# Altium PCB PCB1.PcbDoc
Units mil, origin at the board's own origin, x right, y up, seen from the top; angles counter-clockwise.
Board outline 6000 x 4000 mil, 2 copper layers (Bottom Layer, Top Layer); 52 components, 45 nets, 187 pads, 33 vias.
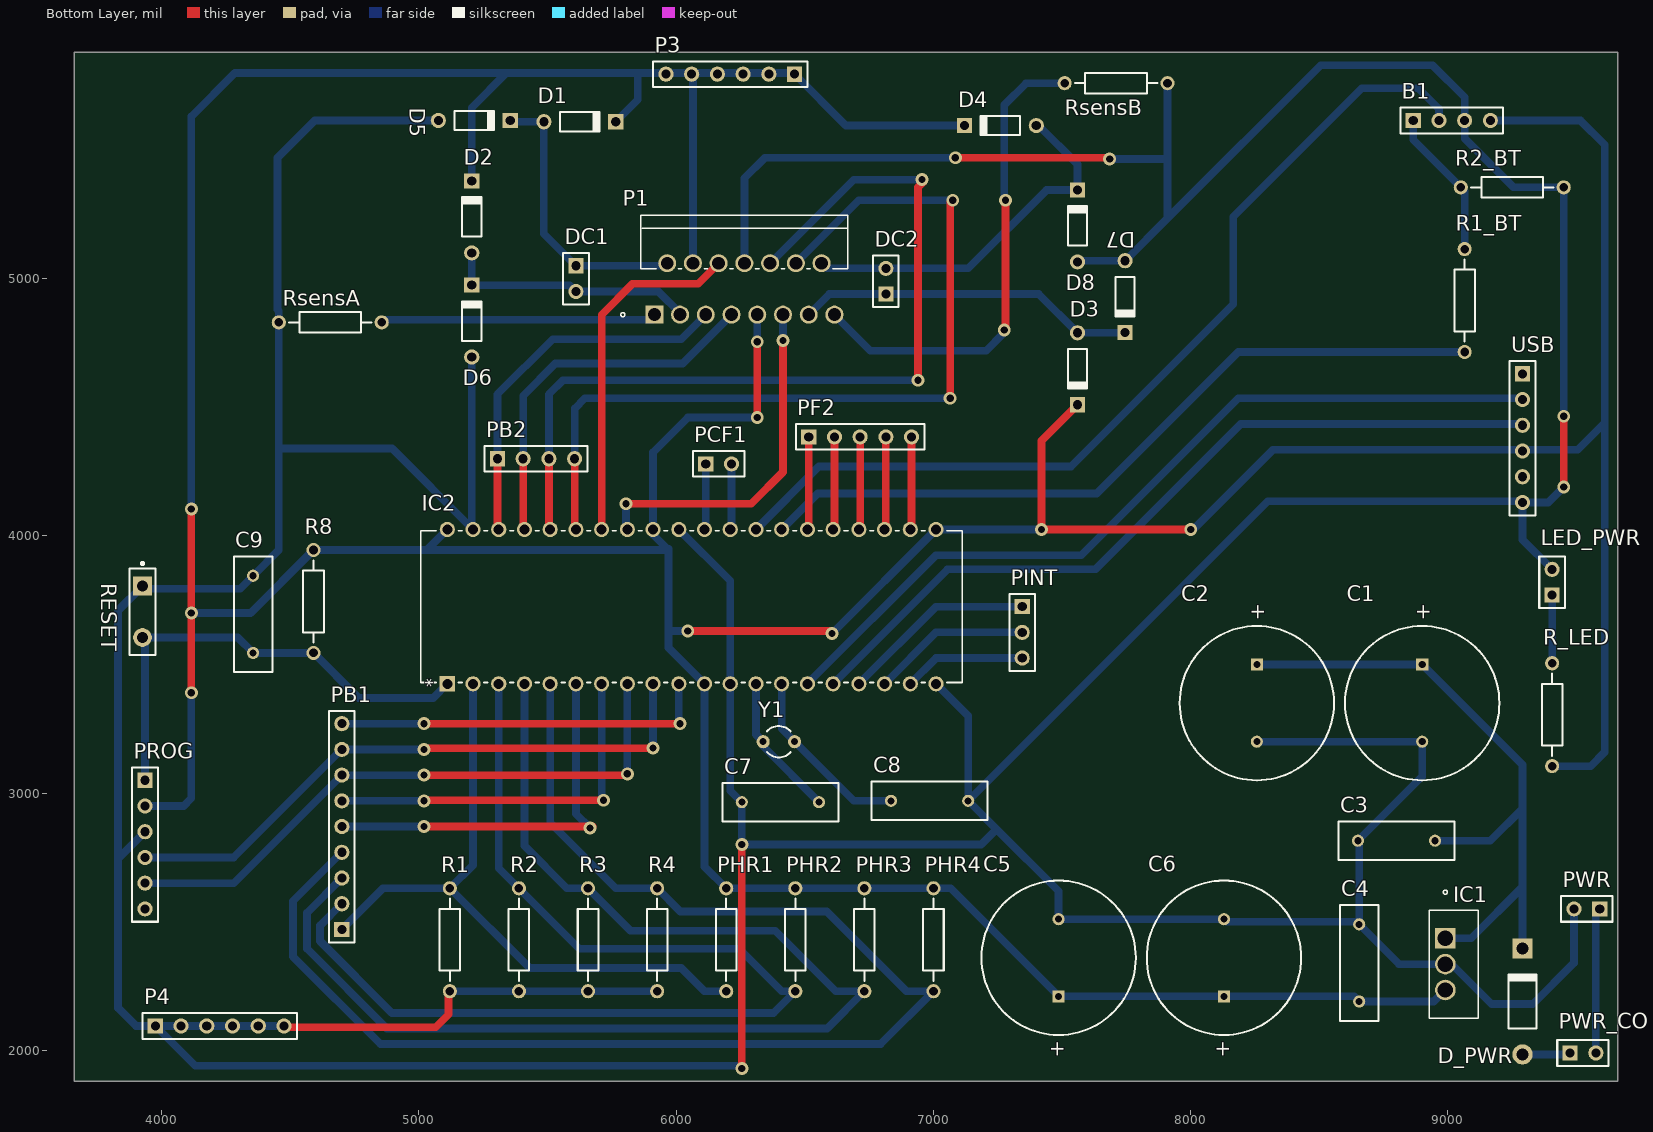
[diagram p0: Bottom Layer view]
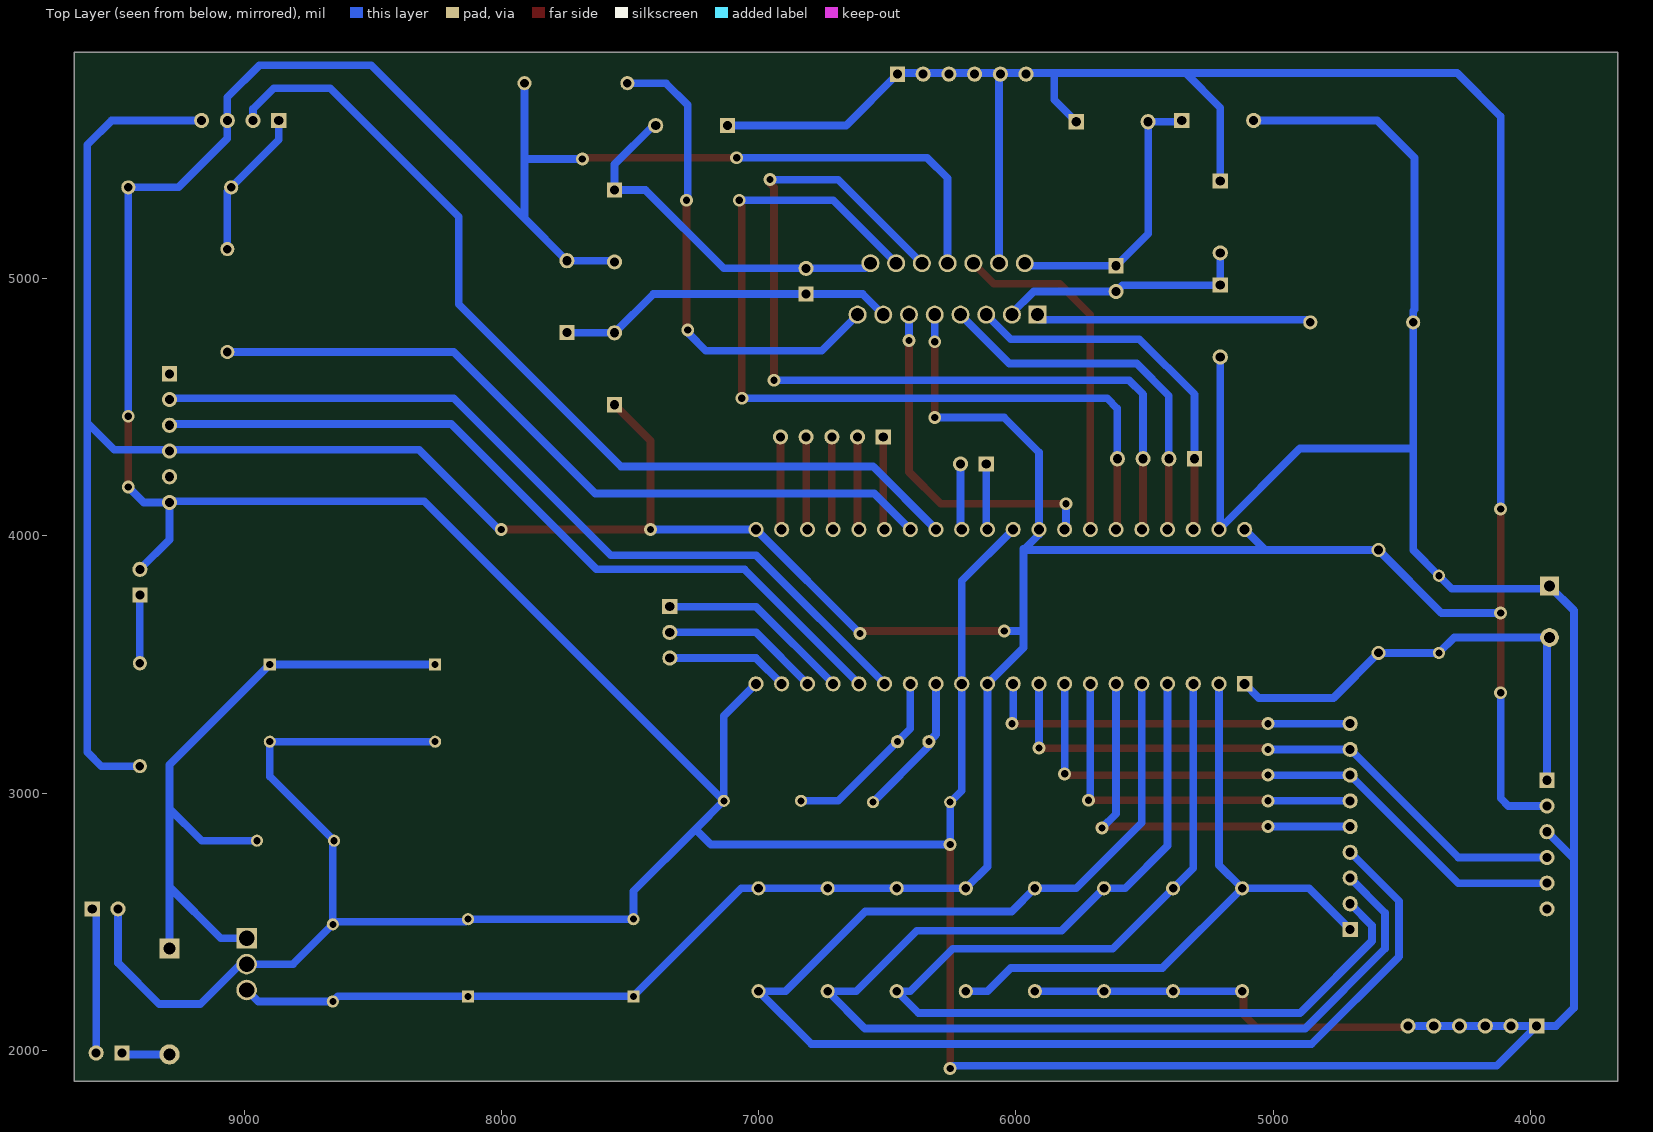
[diagram p1: Top Layer view, seen from below]

## Layer stack, top to bottom
Top Solder: solder mask 0.4, Solder Resist, Dk 3.5
Bottom Layer: signal copper 1.4
Dielectric 1: dielectric 12.6, FR-4, Dk 4.8
Top Layer: signal copper 1.4
Bottom Solder: solder mask 0.4, Solder Resist, Dk 3.5

## Board outline
3660,1880 9660,1880 9660,5880 3660,5880

## Design rules (kind name [scope] priority, off if disabled: settings)
Clearance [All] p1: gap=10 ignorepadtopadclearanceinfootprint=FALSE
PolygonConnect [All] p1: connectstyle=Relief reliefconductorwidth=10 reliefentries=4 polygonreliefangle="90 Angle" airgapwidth=10
RoutingVias [All] p1: holewidth=28 width=50 viastyle="Through Hole" minholewidth=28 minwidth=50 maxholewidth=28 maxwidth=50
SolderMaskExpansion [All] p1: expansion=4
Width [All] p1: maxlimit=50 minlimit=20 preferedwidth=30
30 further rules are at their usual default settings.

## Components (designator, comment, footprint, x,y, rotation, side; value= is the part's Value field where it differs from the comment)
B1 "" HDR1X4 8865,5615 r0 top
C1 "" RB7.6-15 8900,3350 r90 top value=100pF
C2 "" RB7.6-15 8257.13,3350 r90 top value=100pF
C3 "" RAD-0.3 8800,2815 r0 top value=100pF
C4 "" RAD-0.3 8655,2340 r270 top value=100pF
C5 "" RB7.6-15 7486.5,2360 r270 top value=100pF
C6 "" RB7.6-15 8129.37,2360 r270 top value=100pF
C7 "Cap" RAD-0.3 6405,2965 r0 top value=33pF
C8 "Cap" RAD-0.3 6985,2970 r180 top value=33pF
C9 "Cap" RAD-0.3 4355,3695 r90 top value=100nF
D1 "Diode 1N914" DO-35 5625.24,5610 r0 top
D2 "Diode 1N914" DO-35 5205,5240 r90 top
D3 "Diode 1N914" DO-35 7560,4649.76 r270 top
D4 "Diode 1N914" DO-35 7260,5595 r180 top
D5 "Diode 1N914" DO-35 5215,5615 r0 top
D6 "Diode 1N914" DO-35 5205,4835 r90 top
D7 "Diode 1N914" DO-35 7745,4930 r270 top
D8 "Diode 1N914" DO-35 7560,5205 r90 top
D_PWR "" DO-41 9290,2190 r90 top
DC1 "MOTOR" HDR1X2 5610,5050 r270 top
DC2 "MOTOR" HDR1X2 6815,4940 r90 top
IC1 "L7805" TO-220FP_STM 8990,2435.39 r270 top
IC2 "dsPIC30F4013" PDIP40_600MC_MCH 5110,3425 r90 top
LED_PWR "" HDR1X2 9405,3770 r90 top
P1 "L298N" Multiwatt15_V_STM 5915,4860 r0 top
P3 "" HDR1X6 6460,5795 r180 top
P4 "" HDR1X6 3975,2095 r0 top
PB1 "" HDR1X9 4700,2470 r90 top
PB2 "" HDR1X4 5305,4300 r0 top
PCF1 "" HDR1X2 6115,4280 r0 top
PF2 "" HDR1X5 6515,4385 r0 top
PHR1 "Res2" AXIAL-0.4 6194.29,2430 r90 top value=1K
PHR2 "Res2" AXIAL-0.4 6462.86,2430 r90 top value=1K
PHR3 "Res2" AXIAL-0.4 6731.43,2430 r90 top value=1K
PHR4 "Res2" AXIAL-0.4 7000,2430 r90 top value=1K
PINT "INTERRUPTS / D3" HDR1X3 7345,3725 r270 top
PROG "Programator" HDR1X6 3935,3050 r270 top
PWR "Header 2" HDR1X2 9590,2550 r180 top
PWR_CON "Header 2" HDR1X2 9475,1990 r0 top
R1 "Res2" AXIAL-0.4 5120,2430 r90 top value=1K
R1_BT "Res2" AXIAL-0.4 9065,4915 r270 top value=4k7
R2 "Res2" AXIAL-0.4 5388.57,2430 r90 top value=1K
R2_BT "Res2" AXIAL-0.4 9250,5355 r180 top value=10k
R3 "Res2" AXIAL-0.4 5657.14,2430 r90 top value=1K
R4 "Res2" AXIAL-0.4 5925.71,2430 r90 top value=1K
R8 "Res2" AXIAL-0.4 4590,3745 r90 top value=10K
R_LED "" AXIAL-0.4 9405,3305 r270 top value=1K
RESET "SW-PB" SPST-2 3925,3705 r270 top
RsensA "" AXIAL-0.4 4655,4830 r180 top value=1K
RsensB "" AXIAL-0.4 7710,5760 r0 top value=1K
USB "" HDR1X6 9290,4630 r270 top
Y1 "XTAL" R38 6398.98,3200 r270 top

## Footprints (in the part's own frame and the unit in brackets; to place one, negate y for a bottom-side part, rotate by r counter-clockwise, add the part's x,y. Pads: shape width x height; smd on the part's side, far side on the other; paste and mask are expansions set on the pad)
AXIAL-0.4 [mm] "Axial Device, Thru-Hole; 2 Leads; 0.4 in Pin Spacing"
  round 1.4 hole 0.85: 1(-5.08,0) 2(5.08,0)
  silkscreen extent -4.06,-1.02 4.06,1.02
DO-35 [mm] "Diode, Axial; Body 3.8 x 1.9 mm (LxDia. max), Lead Dia. 0.53 mm (max)"
  round 1.5 hole 0.9: 1(-3.55,0)
  rect 1.5x1.5 hole 0.9: 2(3.55,0)
  silkscreen extent -1.95,-0.95 2.05,0.95
DO-41 [mm] "Diode, Axial; Body 5.2 x 2.7 mm (LxDia. max), Lead Dia. 0.86 mm (max)"
  round 2 hole 1.2: 1(-5.23,0)
  rect 2x2 hole 1.2: 2(5.23,0)
  silkscreen extent -2.65,-1.4 2.75,1.4
HDR1X2 [mm] "Connector; Header; 2 Position"
  rect 1.5x1.5 hole 0.9: 1(0,0)
  round 1.5 hole 0.9: 2(2.54,0)
  silkscreen extent -1.27,-1.27 3.81,1.27
HDR1X3 [mm] "Connector; Header; 3 Position"
  rect 1.5x1.5 hole 0.9: 1(0,0)
  round 1.5 hole 0.9: 2(2.54,0) 3(5.08,0)
  silkscreen extent -1.27,-1.27 6.35,1.27
HDR1X4 [mm] "Connector; Header; 4 Position"
  rect 1.5x1.5 hole 0.9: 1(0,0)
  round 1.5 hole 0.9: 2(2.54,0) 3(5.08,0) 4(7.62,0)
  silkscreen extent -1.27,-1.27 8.89,1.27
HDR1X5 [mm] "Connector; Header; 5 Position"
  rect 1.5x1.5 hole 0.9: 1(0,0)
  round 1.5 hole 0.9: 2(2.54,0) 3(5.08,0) 4(7.62,0) 5(10.16,0)
  silkscreen extent -1.27,-1.27 11.43,1.27
HDR1X6 [mm] "Connector; Header; 6 Position"
  rect 1.5x1.5 hole 0.9: 1(0,0)
  round 1.5 hole 0.9: 2(2.54,0) 3(5.08,0) 4(7.62,0) 5(10.16,0) 6(12.7,0)
  silkscreen extent -1.27,-1.27 13.97,1.27
HDR1X9 [mm] "Connector; Header; 9 Position"
  rect 1.5x1.5 hole 0.9: 1(0,0)
  round 1.5 hole 0.9: 2(2.54,0) 3(5.08,0) 4(7.62,0) 5(10.16,0) 6(12.7,0) 7(15.24,0) 8(17.78,0) 9(20.32,0)
  silkscreen extent -1.27,-1.27 21.59,1.27
Multiwatt15_V_STM [mil]
  rect 70x70 / inner round 60 / far side rect 70x70 hole 50 paste-35 mask+0: 1(0,0)
  round 70 / inner round 60 / far side round 70 hole 50 paste-35 mask+0: 2(50,200) 3(100,0) 4(150,200) 5(200,0) 6(250,200) 7(300,0) 8(350,200) 9(400,0) 10(450,200) 11(500,0) 12(550,200) 13(600,0) 14(650,200) 15(700,0)
  silkscreen extent -130,-8 752,386, body extent -48,-15 748,381, height 827
PDIP40_600MC_MCH [mil]
  rect 59x59 / inner round 60 / far side rect 59x59 hole 39 paste-29.5 mask+0: 1(0,0)
  round 59 / inner round 60 / far side round 59 hole 39 paste-29.5 mask+0: 2(0,-100) 3(0,-200) 4(0,-300) 5(0,-400) 6(0,-500) 7(0,-600) 8(0,-700) 9(0,-800) 10(0,-900) 11(0,-1000) 12(0,-1100) 13(0,-1200) 14(0,-1300) 15(0,-1400) 16(0,-1500) 17(0,-1600) 18(0,-1700) 19(0,-1800) 20(0,-1900) 21(600,-1900) 22(600,-1800) 23(600,-1700) 24(600,-1600) 25(600,-1500) 26(600,-1400) 27(600,-1300) 28(600,-1200) 29(600,-1100) 30(600,-1000) 31(600,-900) 32(600,-800) 33(600,-700) 34(600,-600) 35(600,-500) 36(600,-400) 37(600,-300) 38(600,-200) 39(600,-100) 40(600,0)
  silkscreen extent 5,-2002 595,103, body extent -5,-1997 615,97, height 255
R38 [mm] "Crystal, Thru-Hole; 2 Leads; Body 3.1 x 8.2 mm (Dia.xH)"
  round 1.3 hole 0.7: 1(0,1.55) 2(0,-1.55)
  silkscreen extent -1.55,-1.19 1.55,1.17
RAD-0.3 [mm] "Radial Cap, Thru-Hole; 2 Leads; 0.3 in Pin Spacing"
  round 1.2 hole 0.7: 1(-3.81,0) 2(3.81,0)
  silkscreen extent -5.71,-1.91 5.71,1.91
RB7.6-15 [mm] "Polarized Capacitor (Radial); 2 Leads"
  rect 1.2x1.2 hole 0.7: 1(3.81,0)
  round 1.2 hole 0.7: 2(-3.81,0)
  silkscreen extent -7.62,-7.62 7.62,7.62
SPST-2 [mm] "Switch; 2 Leads"
  rect 1.85x1.85 hole 1.1: 1(-2.54,0)
  round 1.85 hole 1.1: 2(2.54,0)
  silkscreen extent -4.89,-1.27 4.28,1.27
TO-220FP_STM [mil]
  rect 80x80 / inner round 60 / far side rect 80x80 hole 60 paste-40 mask-40: 1(0,0)
  round 80 / inner round 60 / far side round 80 hole 60 paste-40 mask-40: 2(100.39,0) 3(200.79,0)
  silkscreen extent -188,-64 310,128, body extent -105,-59 305,123, height 646

## Part data
B1 PB2: library part "Header 4", "Header, 4-Pin", LatestRevisionDate=17-Jul-2002, LatestRevisionNote="Re-released for DXP Platform.", Publisher="Altium Limited"
C1 C2 C5 C6: library part "Cap Pol1", "Polarized Capacitor (Radial)", LatestRevisionDate=17-Jul-2002, LatestRevisionNote="Re-released for DXP Platform.", PackageDescription="Polarized Capacitor (Radial); 2 Leads", PackageReference=RB7.6-15, Published=8-Jun-2000, Publisher="Altium Limited"
C3 C4: library part Cap, "Capacitor", LatestRevisionDate=17-Jul-2002, LatestRevisionNote="Re-released for DXP Platform.", PackageDescription="Radial Cap, Thru-Hole; 2 Leads; 0.3 in Pin Spacing", PackageReference=RAD-0.3, Published=8-Jun-2000, Publisher="Altium Limited"
C7 C8 C9: "Capacitor", LatestRevisionDate=17-Jul-2002, LatestRevisionNote="Re-released for DXP Platform.", PackageDescription="Radial Cap, Thru-Hole; 2 Leads; 0.3 in Pin Spacing", PackageReference=RAD-0.3, Published=8-Jun-2000, Publisher="Altium Limited"
D1 D2 D3 D4 D5 D6 D7 D8: "High Conductance Fast Diode", Code_JEDEC=DO-204-AH, ComponentLink1Description="Manufacturer Link", ComponentLink1URL=http://www.fairchildsemi.com/, ComponentLink2Description=Datasheet, ComponentLink2URL=http://www.fairchildsemi.com/ds/1N%2F1N4448.pdf, DatasheetVersion=1997, LatestRevisionDate=17-Jul-2002, LatestRevisionNote="Re-released for DXP Platform.", PackageDescription="Diode, Axial; Body 3.8 x 1.9 mm (LxDia. max), Lead Dia. 0.53 mm (max)", PackageReference=DO-35, Published=8-Jun-2000, Publisher="Altium Limited"
D_PWR: library part "Diode 1N4007", "1 Amp General Purpose Rectifier", Code_JEDEC=DO-204-AL, ComponentLink1Description="Manufacturer Link", ComponentLink1URL=http://www.fairchildsemi.com/, ComponentLink2Description=Datasheet, ComponentLink2URL=http://www.fairchildsemi.com/ds/1N%2F1N4001.pdf, DatasheetVersion=1998, LatestRevisionDate=17-Jul-2002, LatestRevisionNote="Re-released for DXP Platform.", PackageDescription="Diode, Axial; Body 5.2 x 2.7 mm (LxDia. max), Lead Dia. 0.86 mm (max)", PackageReference=DO-41, PackageVersion=Aug-1999, Published=8-Jun-2000, Publisher="Altium Limited"
DC1 DC2 PCF1: library part "Header 2", "Header, 2-Pin", LatestRevisionDate=17-Jul-2002, LatestRevisionNote="Re-released for DXP Platform.", Publisher="Altium Limited"
IC1: "Linear Voltage Regulator IC 1 Output 1.5A D2PAK", Package="TO-263-3 Inchange Semiconductor", Availability=Unavailable, MF=STMicroelectronics, MP=L7805, Price=None, SnapEDA_Link=https://www.snapeda.com/parts/L7805/STMicroelectronics/view-part/563125/?ref=snap
IC2: library part IC_40
LED_PWR: library part LED1, "Typical RED GaAs LED", LatestRevisionDate=08-Jul-2005, LatestRevisionNote="Mech Layer 1 removed.", PackageDescription="LED; 2 Leads", PackageReference=LED-1, Published=8-Jun-2000, Publisher="Altium Limited"
P3 P4 PROG USB: library part "Header 6", "Header, 6-Pin", LatestRevisionDate=17-Jul-2002, LatestRevisionNote="Re-released for DXP Platform.", Publisher="Altium Limited"
PB1: library part "Header 9", "Header, 9-Pin", LatestRevisionDate=17-Jul-2002, LatestRevisionNote="Re-released for DXP Platform.", Publisher="Altium Limited"
PF2: library part "Header 5", "Header, 5-Pin", LatestRevisionDate=17-Jul-2002, LatestRevisionNote="Re-released for DXP Platform.", Publisher="Altium Limited"
PHR1 PHR2 PHR3 PHR4 R1 R1_BT R2 R2_BT R3 R4 R8: "Resistor", LatestRevisionDate=17-Jul-2002, LatestRevisionNote="Re-released for DXP Platform.", PackageDescription="Axial Device, Thru-Hole; 2 Leads; 0.4 in Pin Spacing", PackageReference=AXIAL-0.4, Published=8-Jun-2000, Publisher="Altium Limited"
PINT: library part "Header 3", "Header, 3-Pin", LatestRevisionDate=17-Jul-2002, LatestRevisionNote="Re-released for DXP Platform.", Publisher="Altium Limited"
PWR PWR_CON: "Header, 2-Pin", LatestRevisionDate=17-Jul-2002, LatestRevisionNote="Re-released for DXP Platform.", Publisher="Altium Limited"
R_LED RsensA RsensB: library part Res2, "Resistor", LatestRevisionDate=17-Jul-2002, LatestRevisionNote="Re-released for DXP Platform.", PackageDescription="Axial Device, Thru-Hole; 2 Leads; 0.4 in Pin Spacing", PackageReference=AXIAL-0.4, Published=8-Jun-2000, Publisher="Altium Limited"
RESET: "Switch", LatestRevisionDate=17-Jul-2002, LatestRevisionNote="Re-released for DXP Platform.", PackageDescription="Switch; 2 Leads", PackageReference=SPST-2, Published=24-Mar-1999, Publisher="Altium Limited"
Y1: "Crystal Oscillator", LatestRevisionDate=17-Jul-2002, LatestRevisionNote="Re-released for DXP Platform.", PackageDescription="Crystal, Thru-Hole; 2 Leads; Body 3.1 x 8.2 mm (Dia.xH)", PackageReference=R38, Published=8-Jun-2000, Publisher="Altium Limited"

## Via types
v1: diameter 50, hole 28, Bottom Layer to Top Layer, 33 vias

## Nets (pads, with @x,y where several pads share a name; then routed paths per layer and width w, separated by ;. In a path a pad name is that pad's centre, name@x,y a point inside that pad or via, vN(x,y) a via of type N, cw(c..) or ccw(c..) an arc to the next point about the centre after c; other vN are vias at no path point)
+5: B1.4 C4.2 C5.1 C6.1 D1.2 D2.2 D3.2 D4.2 IC1.3 IC2.11 IC2.21 IC2.32 IC2.40 P1.4 P1.9 P3.1 P3.2 P3.3 P3.4 P3.5 P3.6 PHR1.2 PHR2.2 PHR3.2 PHR4.2 PROG.2 R8.2 R_LED.2 USB.4 | length 22777.7
  Bottom Layer w30: v1(4115,3390) v1(4115,3700) v1@4115,4090 ; v1(6045,3630) 6595,3630 v1(6605,3620) ; v1(6315,4460) v1(6315,4755) ; D3.2 7420,4370 v1(7420,4025) v1(8000,4025)
  Top Layer w30: PROG.2 4085,2950 4115,2980 v1(4115,3390) ; v1(4115,3700) 4345,3700 R8.2 5030,3945 ; v1(4115,4105) 4115,5630 4284.76,5799.76 5340,5799.76 ; IC2.40 5030,3945 ; D2.2 5205,5664.76 5340,5799.76 ; D1.2 5850,5695 5850,5799.76 ; v1(6045,3630) 5975,3630 5970,3635 ; P3.5 6065,5790 P1.4 ; v1(6315,4460) 6045,4460 5910,4325 IC2.32 5910,4005 5965,3950 ; v1(6315,4755) P1.9 ; v1(6605,3620) IC2.21 v1(7420,4025) ; D4.2 6660,5595 P3.1 6455.24,5799.76 5850,5799.76 ; v1@8000,4015 8320,4335 9505,4335 9610,4440 ; IC1.3 8945.39,2190 C4.2 8635,2210 C6.1 C5.1 7066.5,2630 PHR4.2 PHR3.2 PHR2.2 PHR1.2 6110,2714.29 IC2.11 5970,3565 5970,3635 ; B1.4 9515,5615 9610,5520 9610,4440 ; R_LED.2 9555,3105 9610,3160 9610,4440 ; 5030,3945 5960,3945 5965,3950 ; 5340,5799.76 5850,5799.76 ; 5965,3950 5970,3945 ; 5965,3950 5970,3950 5970,3945 ; 5970,3635 5970,3945
GND: B1.3 C1.2 C2.2 C3.1 C4.1 C5.2 C6.2 C7.1 C8.1 C9.2 D5.1 D6.1 D7.1 D8.1 IC1.2 IC2.12 IC2.20 IC2.31 IC2.39 LED_PWR.2 P1.8 P4.1 P4.2 P4.3 P4.4 P4.5 P4.6 PROG.3 PWR.2 R1.1 R2.1 R2_BT.1 R3.1 R4.1 RESET.1 RsensA.2 RsensB.2 USB.6 | length 28278.6
  Bottom Layer w30: P4.6 4475,2090 5065,2090 5115,2140 5115,2225 R1.1 ; v1(6255,1930) v1(6255,2800) ; v1(7085,5470) 7680,5470 v1(7685,5465) ; v1(9450,4190) v1(9450,4465)
  Top Layer w30: PROG.3 3830,2745 ; 4440,2095 P4.5 P4.4 P4.3 P4.2 P4.1 ; D5.1 4595,5615 4450,5470 4450,4880 4455,4875 RsensA.2 4455,4340 ; R1.1 R2.1 R3.1 R4.1 R4.1@5915.71,2240 ; D6.1 IC2.39@5205,4030 ; IC2.39 IC2.39@5205,4030 ; IC2.31 6210,3825 IC2.12 6210,3010 C7.1 v1(6255,2800) 7185,2800 7245,2860 ; v1(6255,1930) 6245,1940 4130,1940 P4.1 ; P1.8 6265,5390 6345,5470 v1(7085,5470) ; IC2.20 7135,3300 C8.1 ; D8.1 7564.53,5069.76 D7.1 7910,5234.76 ; v1(7685,5465) 7910,5465 ; RsensB.2 7910,5465 ; C2.2 C1.2 8900,3065 C3.1 8655,2810 C4.1 ; USB.6@9290,4135 8300,4135 C8.1 ; LED_PWR.2 9290,3985 USB.6 9390,4130 v1(9450,4190) ; v1(9450,4465) R2_BT.1 9255,5355 9065,5545 B1.3 9065,5705 8940,5830 8505.24,5830 7910,5234.76 ; PWR.2 9490,2340 9330,2180 9170,2180 9015,2335 IC1.2 8810,2335 C4.1 ; 3830,2745 3830,3710 RESET.1 3935,3795 4305,3795 C9.2 4455,3945 4455,4340 ; 3830,2745 3830,2165 3900,2095 P4.1 ; 4455,4340 4895,4340 IC2.39@5205,4030 ; C8.1 7245,2860 ; 7245,2860 7486.5,2618.5 C5.2 C6.2 8139.37,2500 8645,2500 C4.1 ; 7910,5234.76 7910,5465
MCLR: C9.1 IC2.1 PROG.1 R8.1 RESET.2 | length 1864.3
  Top Layer w30: PROG.1 3935,3595 RESET.2 4295,3605 C9.1 R8.1 4765,3370 5055,3370 IC2.1
NetC1_1: C1.1 C2.1 C3.2 D_PWR.2 IC1.1 | length 2683
  Top Layer w30: C2.1 C1.1 9290,3110 9290,2940 ; C3.2 9165,2815 9290,2940 ; IC1.1 9090.39,2435.39 9290,2635 ; D_PWR.2 9290,2635 ; 9290,2635 9290,2940
NetD_PWR_1: D_PWR.1 PWR_CON.1 | length 187.4
  Top Layer w30: D_PWR.1 9469.09,1984.09 PWR_CON.1
NetLED_PWR_1: LED_PWR.1 R_LED.1 | length 265
  Top Layer w30: R_LED.1 LED_PWR.1
NetP1_1: P1.1 RsensA.1 | length 1045
  Top Layer w30: RsensA.1@4865,4840 P1.1@5910,4840
NetP1_15: P1.15 RsensB.1 | length 1877.2
  Bottom Layer w30: v1(7275,4800) 7280,4805 v1(7280,5305)
  Top Layer w30: P1.15 6755,4720 7205,4720 v1@7270,4785 ; v1@7275,5315 7275,5675 7360,5760 RsensB.1
NetPWR_1: PWR.1 PWR_CON.2 | length 566.2
  Top Layer w30: PWR_CON.2 9575,2535 PWR.1
OSC1: C7.2 IC2.13 Y1.2 | length 561.5
  Top Layer w30: IC2.13 6310,3227.95 Y1.2 6337.95,3182.05 C7.2
OSC2: C8.2 IC2.14 Y1.1 | length 716
  Top Layer w30: IC2.14 6410,3250 Y1.1 6690,2970 C8.2
OUT1: D1.1 D5.2 DC1.1 P1.2 | length 1103.5
  Top Layer w30: D5.2 5359.76,5610 D1.1 5485.47,5174.53 DC1.1 5955,5050 P1.2
OUT2: D2.1 D6.2 DC1.2 P1.3 | length 991.5
  Top Layer w30: D2.1 D6.2 5585.24,4974.76 DC1.2 5930.36,4950 6015,4865.36 P1.3 P1.3@6015,4854.64
OUT3: D3.1 D7.2 DC2.1 P1.13 | length 1325.8
  Top Layer w30: P1.13 6595,4940 DC2.1 7409.53,4940 D3.1 7560.71,4790.24 D7.2
OUT4: D4.1 D8.2 DC2.2 P1.14 | length 1452.1
  Top Layer w30: P1.14 6585,5040 DC2.2 7135,5040 7439.76,5344.76 D8.2 7560,5445 7410,5595 D4.1
Photores1: IC2.2 PB1.1 PHR1.1 R1.2 | length 2558.5
  Top Layer w30: PB1.1 4860,2630 R1.2 ; IC2.2 5210,2720 R1.2 ; PHR1.1 6110,2230 6020,2320 5430,2320 R1.2
Photores2: IC2.3 PB1.2 PHR2.1 R2.2 | length 4246.8
  Top Layer w30: PB1.2 4615,2485 4615,2425 4895,2145 6377.86,2145 PHR2.1 6410,2230 6245,2395 5623.57,2395 R2.2 5310,2708.57 IC2.3
Photores3: IC2.4 PB1.3 PHR3.1 R3.2 | length 4871.3
  Top Layer w30: PB1.3 4565,2535 4565,2395 4875,2085 6586.43,2085 PHR3.1 6620,2230 6385,2465 5822.14,2465 R3.2 5575,2630 5410,2795 IC2.4
Photores4: IC2.5 PB1.4 PHR4.1 R4.2 | length 5500.8
  Top Layer w30: PB1.4 4510,2580 4510,2365 4850,2025 6795,2025 PHR4.1 6895,2230 6585,2540 6015.71,2540 R4.2 5765,2630 5510,2885 IC2.5
RA11: IC2.17 PINT.1 | length 759.3
  Top Layer w30: IC2.17 7010,3725 PINT.1
RB4: IC2.6 PB1.5 | length 1557.8
  Bottom Layer w30: v1(5020,2870) v1@5675,2870
  Top Layer w30: PB1.5 v1(5020,2870) ; IC2.6 5610,2920 v1(5665,2865)
RB5: IC2.7 PB1.6 | length 1476.2
  Bottom Layer w30: v1(5020,2970) 5025,2975 5027.5,2972.5 v1(5717.5,2972.5)
  Top Layer w30: PB1.6 v1(5020,2970) ; IC2.7 5710,2980 v1(5717.5,2972.5)
RB6/PGC: IC2.8 PB1.7 PROG.5 | length 2399
  Bottom Layer w30: v1(5020,3070) v1@5810,3070
  Top Layer w30: PROG.5 4280,2650 PB1.7 v1(5020,3070) ; v1(5810,3075) IC2.8
RB7/PGD: IC2.9 PB1.8 PROG.4 | length 2401
  Bottom Layer w30: v1(5020,3170) 5025,3175 v1(5910,3175)
  Top Layer w30: PROG.4 4280,2750 PB1.8 v1(5020,3170) ; v1(5910,3175) IC2.9
RB8: IC2.10 PB1.9 | length 1472.1
  Bottom Layer w30: v1(5020,3270) v1(6015,3270)
  Top Layer w30: PB1.9 v1(5020,3270) ; IC2.10 6010,3275 v1(6015,3270)
RB9: IC2.38 P1.5 PB2.1 | length 1465.5
  Bottom Layer w30: PB2.1 5305,4030 IC2.38
  Top Layer w30: PB2.1 5305,4550 5520,4765 6020,4765 P1.5
RB10: IC2.37 P1.7 PB2.2 | length 1462.5
  Bottom Layer w30: PB2.2 5405,4030 IC2.37
  Top Layer w30: PB2.2 5405,4545 5530,4670 6025,4670 P1.7
RB11: IC2.36 P1.10 PB2.3 | length 3487.8
  Bottom Layer w30: PB2.3 5505,4030 IC2.36 ; v1(6940,4605) 6940,5355 v1@6960,5375
  Top Layer w30: PB2.3 5505,4550 5560,4605 v1(6940,4605) ; P1.10 6690,5385 v1(6955,5385)
RB12: IC2.35 P1.12 PB2.4 | length 3434.3
  Bottom Layer w30: PB2.4 5605,4030 IC2.35 ; v1(7065,4535) 7065,5295 v1(7075,5305)
  Top Layer w30: PB2.4 5605,4495 5645,4535 v1(7065,4535) ; P1.12 6710,5305 v1(7075,5305)
RD0: IC2.34 P1.6 | length 1372.8
  Bottom Layer w30: IC2.34 5710,4860 5830,4980 6085,4980 P1.6
RD1: IC2.33 P1.11 | length 1384.8
  Bottom Layer w30: v1(5805,4125) 6291.57,4125 6415,4248.43 v1(6415,4760)
  Top Layer w30: v1(5805,4125) 5805,4030 IC2.33 ; v1@6415,4750 v1(6415,4760) P1.11
RD2: IC2.22 PF2.5 | length 369.1
  Bottom Layer w30: IC2.22 6915,4030 PF2.5
  Top Layer w30: IC2.22 IC2.22@6915,4030
RD3: IC2.19 PINT.3 | length 476.4
  Top Layer w30: IC2.19 7010,3525 PINT.3
RD8: IC2.23 PF2.4 | length 369.1
  Bottom Layer w30: IC2.23 6815,4030 PF2.4
  Top Layer w30: IC2.23 IC2.23@6815,4030
RD9: IC2.18 PINT.2 | length 617.8
  Top Layer w30: IC2.18 7010,3625 PINT.2
RF0: IC2.30 PCF1.1 | length 257.1
  Top Layer w30: IC2.30 6115,4030 PCF1.1
RF1: IC2.29 PCF1.2 | length 257.1
  Top Layer w30: IC2.29 6215,4030 PCF1.2
RF2: IC2.26 PF2.1 | length 369.1
  Bottom Layer w30: IC2.26 6515,4030 PF2.1
  Top Layer w30: IC2.26 IC2.26@6515,4030
RF3: IC2.25 PF2.2 | length 369.1
  Bottom Layer w30: IC2.25 6615,4030 PF2.2
  Top Layer w30: IC2.25 IC2.25@6615,4030
RF6: IC2.24 PF2.3 | length 369.1
  Bottom Layer w30: IC2.24 6715,4030 PF2.3
  Top Layer w30: IC2.24 IC2.24@6715,4030
Rx_bluetooth: B1.1 R1_BT.1 R2_BT.2 | length 582.8
  Top Layer w30: B1.1 8865,5540 R2_BT.2 9065,5340 R1_BT.1
Rx_usb: IC2.15 USB.2 | length 3239.8
  Top Layer w30: IC2.15 7010,3925 7575,3925 8185,4535 USB.2@9290,4535
Tx_bluetooth: B1.2 IC2.28 | length 3642.7
  Top Layer w30: IC2.28 6555,4270 7535,4270 8165,4900 8165,5240 8665,5740 8885,5740 8965,5660 B1.2
Tx_usb: IC2.16 USB.3 | length 3098.4
  Top Layer w30: IC2.16 7055,3870 7630,3870 8195,4435 USB.3@9290,4435
U2TX: IC2.27 R1_BT.2 | length 2940.8
  Top Layer w30: IC2.27 6550,4165 7635,4165 8185,4715 R1_BT.2
pads on no net: PROG.6 USB.1 USB.5

## Text inside footprints (layer, text, board x,y; h text height)
C1: Top Overlay "+" at 8929.01,3670.15 h59.06 r90
C2: Top Overlay "+" at 8286.13,3670.15 h59.06 r90
C5: Top Overlay "+" at 7457.49,2039.85 h59.06 r270
C6: Top Overlay "+" at 8100.36,2039.85 h59.06 r270
IC2: Top Overlay "*" at 5075.5,3412.5 h50 r90; Mechanical 13 "*" at 5135,3432.5 h50 r90
P1: Mechanical 13 "TAB" at 6246.25,5203.21 h25